# EAGLE board X12 Power Distribuition (EAGLE 9.2.0)
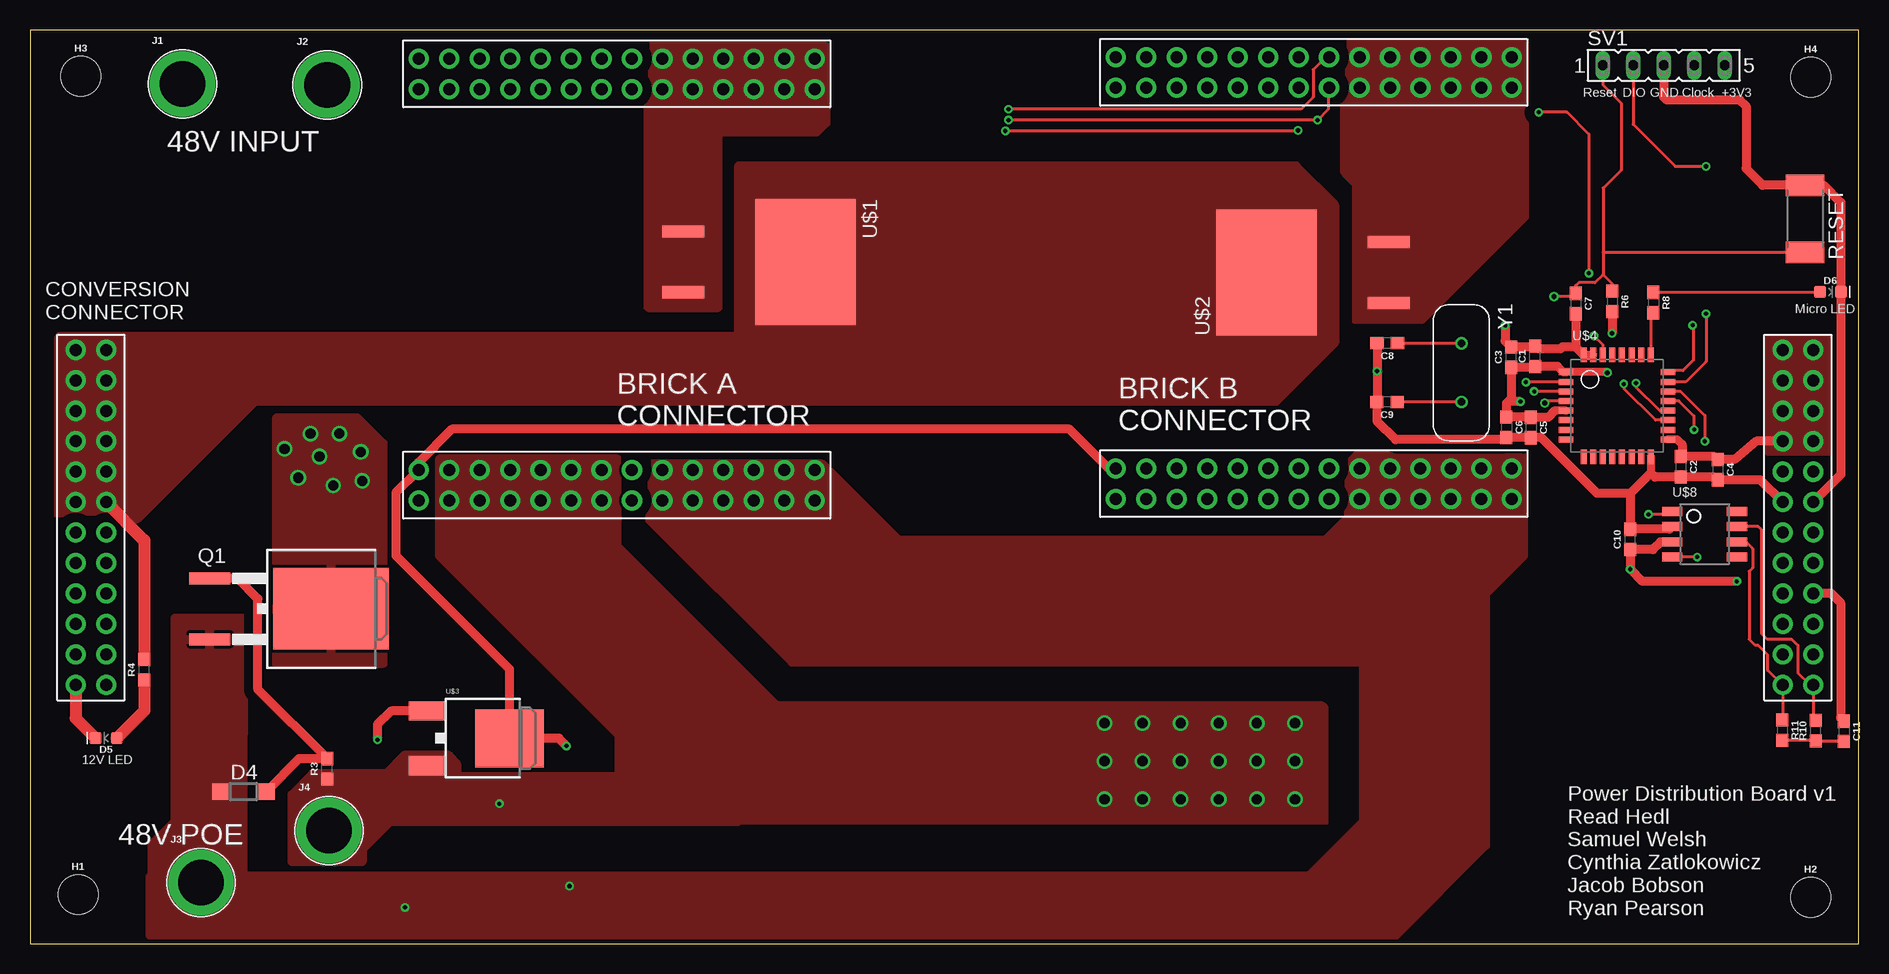
[diagram p0: board, top side]
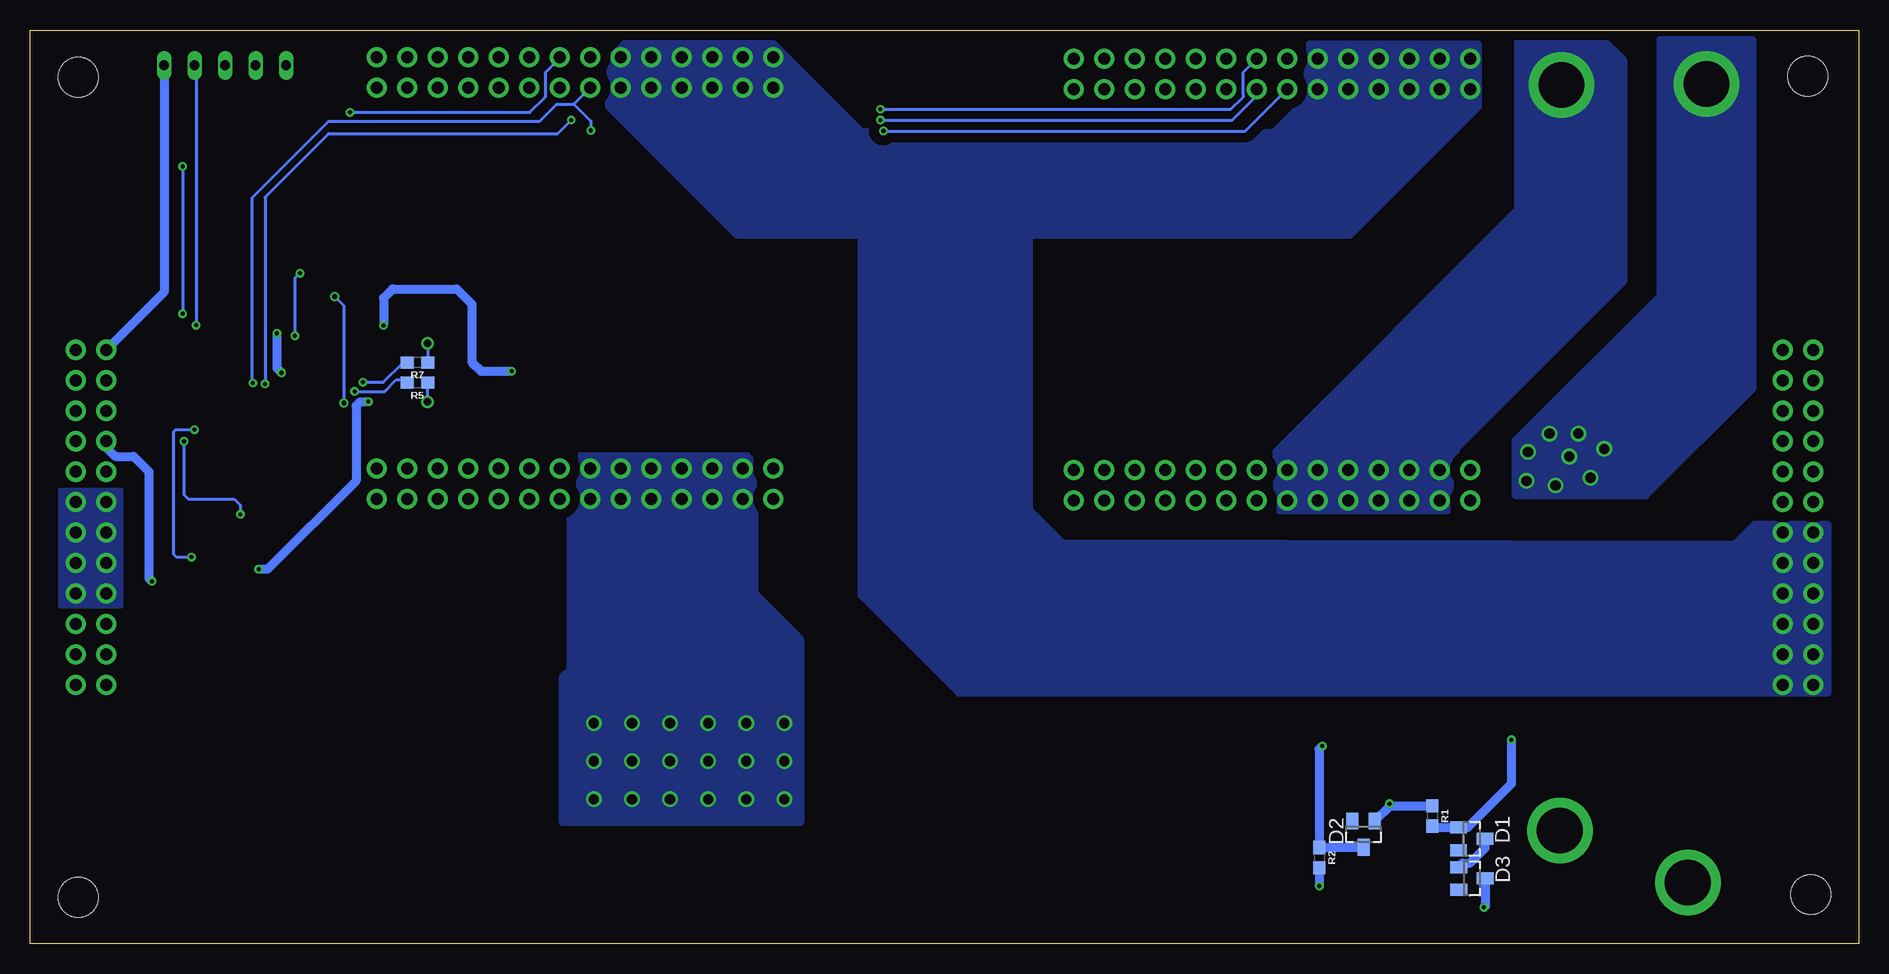
[diagram p1: board, bottom side, seen from below]

Size 152.4 x 76.2 mm. Coordinates in mm from the lower left corner, seen from the top.
Outline: 0,0 152.4,0 152.4,76.2 0,76.2 0,0
Copper layers (1*16): Top 0.0356mm / dielectric 1.5011mm / Bottom 0.0356mm
Design rules "ECE_Senior_Design": minimum track width 8mil, minimum drill 13mil, track to track 8mil, track to pad 8mil, pad to pad 6mil, via to via 8mil, smd to smd 6mil, copper to edge 15mil, drill to drill 8mil, minimum pad ring 7mil, minimum via ring 7mil, stop-mask expansion 3mil, vias tented up to drill 0mil, thermal gap 10mil

## Footprints (pad centres in the part's own frame; a part is rotated, then mirrored left to right if it is on the bottom)
0603 = smd 1.1 x 1: 1 -0.85,0; 2 0.85,0
SOT23 = smd 1 x 1.4: 1 -0.95,-1.1; 2 0.95,-1.1; 3 0,1.1
SOD123 = smd 1.4 x 1.4: A 1.9,0; C -1.9,0
LED-0603 = smd 1 x 1: A -0.877,0; C 0.877,0
STAND-OFF = hole 3.302: 0,0
BANANA_CONN = drill 3.81 pad 5.461: P$1 0,0
TO263 = smd 1 x 3.4: 1 -2.54,-6.6; 2 2.54,-6.6 | smd 6.8 x 9.6: 3 0,3.5
SW_2512 = smd 1.8 x 3.2: 1 -2.8,0; 2 2.8,0
FE05-1 = drill 0.813 long: 1 -5.08,0; 2 -2.54,0; 3 0,0; 4 2.54,0; 5 5.08,0
DIODE = smd 1.016 x 3.504: IN1 2.705,-6.023; IN2 7.785,-6.023 | smd 10.49 x 8.38: OUT 5.245,4.19
DPAK = smd 1.6 x 3: 1 -2.28,-5.31; 3 2.28,-5.31 | smd 4.826 x 5.715: 4 0,1.588
STM32F042K6T6 = smd 1.2 x 0.5: NRST 0,3.2; PA0 0,1.6; PA1 0,0.8; PA2 0,0; PA8 8.5,0.8; PA9 8.5,1.6; PA10 8.5,2.4; PA11 8.5,3.2; PA12 8.5,4; PA13 8.5,4.8; PA14 8.5,5.6; PF0-OSC_IN 0,4.8; PF1-OSC_OUT 0,4; VDD 0,5.6; VDDA 0,2.4; VDDIO2 8.5,0 | smd 0.5 x 1.2: PA3 1.45,-1.45; PA4 2.25,-1.45; PA5 3.05,-1.45; PA6 3.85,-1.45; PA7 4.65,-1.45; PA15 7.05,7.05; PB0 5.45,-1.45; PB1 6.25,-1.45; PB3 6.25,7.05; PB4 5.45,7.05; PB5 4.65,7.05; PB6 3.85,7.05; PB7 3.05,7.05; PB8-BOOT0 2.25,7.05; VSS 7.05,-1.45; VSS1 1.45,7.05
BRICKBOARD_TSW_14X2 = drill 1 pad 1.676: 1 0,2.54; 2 0,0; 3 2.54,2.54; 4 2.54,0; 5 5.08,2.54; 6 5.08,0; 7 7.62,2.54; 8 7.62,0; 9 10.16,2.54; 10 10.16,0; 11 12.7,2.54; 12 12.7,0; 13 15.24,2.54; 14 15.24,0; 15 17.78,2.54; 16 17.78,0; 17 20.32,2.54; 18 20.32,0; 19 22.86,2.54; 20 22.86,0; 21 25.4,2.54; 22 25.4,0; 23 27.94,2.54; 24 27.94,0; 25 30.48,2.54; 26 30.48,0; 27 33.02,2.54; 28 33.02,0; 29 0,36.83; 30 0,34.29; 31 2.54,36.83; 32 2.54,34.29; 33 5.08,36.83; 34 5.08,34.29; 35 7.62,36.83; 36 7.62,34.29; 37 10.16,36.83; 38 10.16,34.29; 39 12.7,36.83; 40 12.7,34.29; 41 15.24,36.83; 42 15.24,34.29; 43 17.78,36.83; 44 17.78,34.29; 45 20.32,36.83; 46 20.32,34.29; 47 22.86,36.83; 48 22.86,34.29; 49 25.4,36.83; 50 25.4,34.29; 51 27.94,36.83; 52 27.94,34.29; 53 30.48,36.83; 54 30.48,34.29; 55 33.02,36.83; 56 33.02,34.29
CONVERSION_TSW_12X2 = drill 1 pad 1.676: 1 0,2.54; 2 0,0; 3 2.54,2.54; 4 2.54,0; 5 5.08,2.54; 6 5.08,0; 7 7.62,2.54; 8 7.62,0; 9 10.16,2.54; 10 10.16,0; 11 12.7,2.54; 12 12.7,0; 13 15.24,2.54; 14 15.24,0; 15 17.78,2.54; 16 17.78,0; 17 20.32,2.54; 18 20.32,0; 19 22.86,2.54; 20 22.86,0; 21 25.4,2.54; 22 25.4,0; 23 27.94,2.54; 24 27.94,0; 25 0,144.78; 26 0,142.24; 27 2.54,144.78; 28 2.54,142.24; 29 5.08,144.78; 30 5.08,142.24; 31 7.62,144.78; 32 7.62,142.24; 33 10.16,144.78; 34 10.16,142.24; 35 12.7,144.78; 36 12.7,142.24; 37 15.24,144.78; 38 15.24,142.24; 39 17.78,144.78; 40 17.78,142.24; 41 20.32,144.78; 42 20.32,142.24; 43 22.86,144.78; 44 22.86,142.24; 45 25.4,144.78; 46 25.4,142.24; 47 27.94,144.78; 48 27.94,142.24
TCAN337D = smd 1.7 x 0.75: CANH 5.4,2.54; CANL 5.4,1.27; FAULT 5.4,0; GND 0,2.54; RXD 0,0; S 5.4,3.81; TXD 0,3.81; VCC 0,1.27
XTAL_ECS-80-S-4X = drill 0.63 pad 1.03: 1 -2.44,0; 2 2.44,0

## Placement (x,y rotation side)
C1  4.7uF  [0603]  125.43,49 90 top
C2  4.7uF  [0603]  137.57,39.78 270 top
C3  4.7uF  [0603]  123.44,48.92 90 top
C4  4.7uF  [0603]  140.64,39.55 270 top
C5  4.7uF  [0603]  125.07,43.05 270 top
C6  4.7uF  [0603]  123.04,43.08 270 top
C7  4.7uF  [0603]  128.8,53.39 270 top
C8  4.7uF  [0603]  113.11,50.09 180 top
C9  4.7uF  [0603]  113.08,45.19 180 top
C10  4.7uF  [0603]  133.35,33.73 90 top
C11  0.1uF  [0603]  151.16,17.73 270 top
D1  22V  [SOT23]  32.26,8.76 270 bottom
D2  5V  [SOT23]  41.27,9.14 180 bottom
D3  22V  [SOT23]  32.23,5.46 270 bottom
D4  15V  [SOD123]  17.78,12.7 0 top
D5  [LED-0603]  6.35,17.14 180 top
D6  [LED-0603]  150.04,54.36 0 top
H1  STAND-OFF  [STAND-OFF]  4.01,4.11 0 top
H2  STAND-OFF  [STAND-OFF]  148.39,3.89 0 top
H3  STAND-OFF  [STAND-OFF]  4.24,72.34 0 top
H4  STAND-OFF  [STAND-OFF]  148.39,72.26 0 top
J1  [BANANA_CONN]  12.7,71.7 0 top
J2  [BANANA_CONN]  24.77,71.63 0 top
J3  [BANANA_CONN]  14.25,5.11 0 top
J4  [BANANA_CONN]  24.92,9.45 0 top
Q1  SPB80P06P  [TO263]  21.59,27.94 270 top
R1  1M  [0603]  35.56,10.67 270 bottom
R2  10K  [0603]  44.98,7.19 270 bottom
R3  1M  [0603]  24.77,14.61 90 top
R4  470  [0603]  9.53,22.86 90 top
R5  1k  [0603]  120.12,46.79 180 bottom
R6  1k  [0603]  131.85,53.57 270 top
R7  1k  [0603]  120.12,48.49 180 bottom
R8  470  [0603]  135.28,53.47 270 top
R10  60  [0603]  148.82,17.78 90 top
R11  60  [0603]  146.02,17.83 270 top
RESET  [SW_2512]  147.93,60.45 270 top
SV1  [FE05-1]  136.14,73.25 0 top
U$1  DIODE  [DIODE]  60.45,62.1 270 top
U$2  DIODE  [DIODE]  107.21,50.72 90 top
U$3  NMOSFET-DPAK  [DPAK]  38.35,17.14 270 top
U$4  STM32F042K6T6  [STM32F042K6T6]  128.02,42.06 0 top
U$5  BRICKBOARD_TSW_14X2  [BRICKBOARD_TSW_14X2]  90.47,37.11 0 top
U$6  CONVERSION_TSW_12X2  [CONVERSION_TSW_12X2]  3.81,49.53 270 top
U$7  BRICKBOARD_TSW_14X2  [BRICKBOARD_TSW_14X2]  32.38,36.98 0 top
U$8  TCAN337D  [TCAN337D]  136.86,32.26 0 top
Y1  ECS-80-S-4X  [XTAL_ECS-80-S-4X]  119.28,47.62 270 top

## Library data of the parts
C1-C10 = SparkFun-Capacitors; PROD_ID: CAP-08280
C11 = SparkFun-Capacitors; PROD_ID: CAP-00810
D1-D4 = diode
D5 D6 = SparkFun-LED
H1-H4 = SparkFun-Hardware
J1-J4 = SparkFun-Connectors
Q1 = transistor-fet
R1-R3 = SparkFun-Resistors; SPICEPREFIX: R
R4 R8 = SparkFun-Resistors
R5-R7 R10 R11 = SparkFun-Resistors; PROD_ID: RES-07856
RESET = DiscreteComponents
SV1 = con-lsta; OC_FARNELL: unknown; OC_NEWARK: unknown
U$1 U$2 = DIODE
U$3 = MotherboardParts; PN-DIGI: 497-4329-1-ND; VDSS: 60V
U$4 U$8 = PI_Shield_Library
U$5 U$7 = Dist_to_Brickboard_Connector
U$6 = Dist_to_Conversion_Connector
Y1 = ECS-80-S-4X; DESCRIPTION: Crystal 8MHz Series 2-Pin HC-49/U; DIGI-KEY_PART_NUMBER: X1057-ND; DIGI-KEY_PURCHASE_URL: https://www.digikey.com/product-detail/en/ecs-inc/ECS-80-S-4X/X1057-ND/827549?utm_source=snapeda&utm_medium=aggregator&utm_campaign=symbol; MF: ECS International; MP: ECS-80-S-4X; PACKAGE: HC-49/US ECS International

## Nets
3V3GND: C1.2 C2.2 C3.2 C4.2 C5.2 C6.2 C7.2 C8.2 C9.2 C10.2 C11.1 D6.C RESET.1 SV1.3 U$4.PB8-BOOT0 U$4.VSS U$4.VSS1 U$6.35 U$6.36 U$6.37 U$6.38 U$6.39 U$6.40 U$6.41 U$6.42 U$8.GND
48V_GND: D2.1 J2.P$1 J4.P$1 R1.1 R3.1 U$3.3 U$5.3 U$5.4 U$5.5 U$5.6 U$5.7 U$5.8 U$5.9 U$5.10 U$5.11 U$5.12 U$5.13 U$5.14 U$7.3 U$7.4 U$7.5 U$7.6 U$7.7 U$7.8 U$7.9 U$7.10 U$7.11 U$7.12 U$7.13 U$7.14
+3V3: C1.1 C2.1 C3.1 C4.1 C5.1 C6.1 C10.1 R6.2 SV1.5 U$4.VDD U$4.VDDA U$4.VDDIO2 U$6.25 U$6.26 U$6.27 U$6.28 U$6.29 U$6.30 U$6.31 U$6.32 U$8.VCC
+12V: R4.2 U$1.OUT U$2.OUT U$6.1 U$6.2 U$6.3 U$6.4 U$6.5 U$6.6 U$6.7 U$6.8 U$6.9 U$6.10 U$6.11 U$6.12
+12V_A: U$1.IN1 U$1.IN2 U$7.45 U$7.46 U$7.47 U$7.48 U$7.49 U$7.50 U$7.51 U$7.52 U$7.53 U$7.54 U$7.55 U$7.56
+12V_B: U$2.IN1 U$2.IN2 U$5.45 U$5.46 U$5.47 U$5.48 U$5.49 U$5.50 U$5.51 U$5.52 U$5.53 U$5.54 U$5.55 U$5.56
+48V: D3.3 D4.C J3.P$1 Q1.2 R2.2 U$5.17 U$5.18 U$5.19 U$5.20 U$5.21 U$5.22 U$5.23 U$5.24 U$5.25 U$5.26 U$5.27 U$5.28 U$7.17 U$7.18 U$7.19 U$7.20 U$7.21 U$7.22 U$7.23 U$7.24 U$7.25 U$7.26 U$7.27 U$7.28
+48V_RAW: J1.P$1 Q1.3
ALERT: U$4.PB7 U$5.43 U$7.43
CAN_H: R10.2 U$6.47 U$8.CANH
CAN_L: R11.1 U$6.48 U$8.CANL
CAN_RX: U$4.PA11 U$8.RXD
CAN_TX: U$4.PA12 U$8.TXD
CLK: U$4.PA9 U$5.44 U$7.44
DATA: U$4.PA10 U$5.42 U$7.42
GND: D5.C U$5.29 U$5.30 U$5.31 U$5.32 U$5.33 U$5.34 U$5.35 U$5.36 U$5.37 U$5.38 U$5.39 U$5.40 U$6.13 U$6.14 U$6.15 U$6.16 U$6.17 U$6.18 U$6.19 U$6.20 U$6.21 U$6.22 U$6.23 U$6.24 U$7.29 U$7.30 U$7.31 U$7.32 U$7.33 U$7.34 U$7.35 U$7.36 U$7.37 U$7.38 U$7.39 U$7.40
LED: R8.2 U$4.PA15
N$1: D1.3 D3.1
N$2: D1.1 R1.2 U$3.1
N$3: D4.A Q1.1 R3.2
N$4: D5.A R4.1
N$5: C11.2 R10.1 R11.2
N$6: C9.1 R5.1 Y1.2
N$7: C8.1 R7.1 Y1.1
N$24: D6.A R8.1
NRST: C7.1 R6.1 RESET.2 SV1.1 U$4.NRST
ON/OFF: D2.3 R2.1 U$3.4 U$5.1 U$7.1
OSC_IN: R7.2 U$4.PF0-OSC_IN
OSC_OUT: R5.2 U$4.PF1-OSC_OUT
SWCLK: SV1.4 U$4.PA14
SWDIO: SV1.2 U$4.PA13

## Tracks (layer width: path | path; a pad name or v marks a point on that pad's centre or on a via)
3V3GND  (via drill 0.35)
  Top 0.686: U$4.PB8-BOOT0 U$4.VSS1 | U$4.VSS 135.07,39.28
  Top 0.762: U$6.36 144.18,38.7 C4.2 140.41,38.93 C2.2 135.42,38.93 135.07,39.28 133.35,37.56 | U$6.35 150.91,39.16 D6.C 150.91,61.81 149.47,63.25 RESET.1 144.39,63.25 143,64.64 143,69.85 142.49,70.36 136.4,70.36 136.14,70.61 SV1.3 | U$4.VSS1 128.8,49.77 | C7.2 128.8,49.77 | 128.8,49.77 127.7,49.77 127.53,49.61 125.72,49.61 125.47,49.85 C1.2 125.35,49.77 C3.2 122.94,50.28 v122.94,51.56 | C11.1 150.88,18.86 150.88,28.45 150.11,29.21 U$6.41 | U$8.GND 136.64,34.58 C10.2 133.35,37.56 | 133.35,37.56 130.58,37.56 125.94,42.2 C5.2 125.04,42.23 C6.2 122.85,42.04 113.79,42.04 112.23,43.6 C9.2 112.26,45.21 v112.26,47.75 C8.2
  Bottom 0.762: v122.94,51.56 122.94,53.85 122.17,54.61 116.84,54.61 115.57,53.34 115.57,48.51 114.81,47.75 v112.26,47.75
  pour Bottom (no thermals): 144.78,37.85 149.86,37.85 149.86,28.19 144.78,28.19
48V_GND  (via drill 0.35, 0.85 pad 1.3)
  Bottom 0.762: 38.95,11.52 R1.1 | v39.12,11.68 38.95,11.52 | D2.1 39.05,11.52 38.95,11.52
  other vias: 89.53,18.41 92.71,18.41 95.89,18.41 99.06,18.41 102.23,18.41 105.41,18.41 105.41,15.24 105.41,12.06 102.23,12.06 102.23,15.24 99.06,15.24 95.89,15.24 92.71,15.24 89.53,15.24 89.53,12.06 92.71,12.06 95.89,12.06 99.06,12.06
  pour Bottom (isolate 0.813, no thermals): 21.34,75.31 19.68,73.66 19.68,55.24 33.66,41.27 33.66,36.83 34.29,36.2 48.26,36.2 48.9,36.83 48.9,40.64 28.32,61.21 28.32,75.31
  pour Bottom (isolate 0.813, no thermals): 92.08,40.01 92.08,29.21 88.27,25.4 88.27,10.16 107.95,10.16 107.95,22.23 107.31,22.86 107.31,40.01 106.68,40.64 92.71,40.64
  pour Top (no thermals): 21.84,6.86 21.84,12.45 23.62,14.22 29.72,14.22 31.24,15.75 34.8,15.75 35.56,14.99 35.56,13.97 57.66,13.97 58.93,12.7 58.93,10.16 29.97,10.16 27.69,7.87 27.69,6.86
  pour Top (no thermals): 34.11,40.41 34.11,32.38 49.05,17.45 49.05,11.43 50.14,10.34 107.67,10.34 107.85,10.16 107.85,19.66 107.77,19.74 107.67,19.84 62.23,19.84 48.95,33.12 48.95,40.41
+3V3  (via drill 0.35, 0.4)
  Top 0.686: 127.3,48.15 127.79,47.66 U$4.VDD 131.41,47.66 | U$4.VDDA 127.06,44.46 | U$4.VDDIO2 137.26,42.06 137.67,41.66
  Top 0.762: U$6.32 143.87,41.91 142.06,40.4 C4.1 140.41,40.63 C2.1 137.67,40.73 137.67,41.66 | R6.2 131.85,50.93 v131.83,50.9 | 127.3,48.15 C1.1 125.35,48.07 C3.1 123.44,45.47 123.19,45.21 | v131.44,47.62 131.41,47.66 | 127.06,44.46 126.51,43.9 C5.1 125.04,43.93 C6.1 123.04,45.06 123.19,45.21 | U$8.VCC 135.89,33.53 135.24,32.88 C10.1 v133.35,31.24 134.37,30.23 v142.24,30.23 | v124.21,45.21 123.19,45.21
  Bottom 0.762: SV1.5 141.22,54.36 U$6.26 | v131.44,47.62 131.83,48.01 v131.83,50.9 | U$6.32 146.05,41.4 145.29,40.64 143.76,40.64 142.49,39.37 142.49,30.48 v142.24,30.23 | v124.21,45.21 124.88,45.21 125.22,44.87 125.22,38.61 132.59,31.24 v133.35,31.24
  pour Top (no thermals): 144.78,50.55 149.86,50.55 149.86,40.89 144.78,40.89
+12V
  Top 1.016: U$6.11 9.53,33.66 R4.2
  pour Top (isolate 0.813, no thermals): 59.18,64.77 105.41,64.77 108.58,61.59 108.58,50.16 103.76,45.34 18.67,45.34 8.89,35.56 2.54,35.56 2.54,50.55 59.18,50.55
+12V_A
  pour Top (isolate 0.813, no thermals): 51.52,74.75 51.52,53.11 57.33,53.11 57.33,67.74 65.56,67.74 66.32,68.5 66.32,74.75
+12V_B
  pour Top (isolate 0.813, no thermals): 109.58,64.39 110.57,63.4 110.57,52.27 110.41,52.12 116,52.12 124.51,60.63 124.51,75.11 109.58,75.11
+48V  (via drill 0.35)
  Bottom 0.762: D3.3 31.12,3.17 v31.24,3.05 | R2.2 44.98,4.85 v44.96,4.83
  pour Top (isolate 0.762, no thermals): 51.44,40.01 51.44,35.56 63.5,23.5 115.57,23.5 124.46,32.38 124.46,40.64 124.33,40.77 110.62,40.77 109.86,40.01 109.86,35.56 107.95,33.66 72.39,33.66 66.04,40.01
  pour Top (no thermals): 12.06,18.92 12.06,10.16 10.16,8.26 10.16,3.17 12.06,1.27 17.14,1.27 17.78,1.91 17.78,18.92
  pour Top: 112.39,32.38 111.12,31.11 120.65,31.11 119.38,32.38
  pour Top: 111.12,32.38 111.12,10.16 106.56,5.59 10.03,5.59 10.03,0.76 113.79,0.76 121.28,8.26 121.28,32.38
  pour Top (isolate 0.762): 12.09,17.53 12.09,27.18 17.78,27.18 17.78,17.53
+48V_RAW  (via drill 0.85, 0.85 pad 1.3)
  other vias: 21.21,41.27 22.35,38.86 24.13,40.64 27.56,41.02 27.69,38.61 23.37,42.55 25.78,42.55 25.27,38.23
  pour Bottom (no thermals): 16.51,75.31 16.51,53.98 28.57,41.91 28.57,37.47 17.78,37.47 8.89,46.35 8.89,75.31
  pour Top: 20.52,23.39 29.44,23.39 29.44,41.68 27.3,43.81 20.52,43.81
ALERT  (via drill 0.35)
  Top 0.254: v130.33,50.7 131.07,49.96 U$4.PB7 | v125.73,69.34 128.09,69.34 129.91,67.53 v129.91,55.92 | U$5.43 107.97,73.94 106.93,72.9 106.93,70.61 105.92,69.6 v81.53,69.6
  Bottom 0.254: v125.73,69.34 110.74,69.34 109.47,70.61 109.47,72.64 108.25,73.86 U$5.43 | U$7.43 51.33,72.64 51.33,70.79 51.31,70.76 51.31,70.61 52.32,69.6 v81.53,69.6 | v129.91,55.92 130.33,55.5 v130.33,50.7
CAN_H
  Top 0.254: R10.2 148.59,18.86 U$6.47 148.34,21.59 147.32,22.61 147.32,24.89 146.81,25.4 144.78,25.4 144.27,25.91 144.27,34.54 144.02,34.8 U$8.CANH
CAN_L
  Top 0.254: R11.1 146.16,18.82 146.05,18.92 U$6.48 144.78,22.86 144.78,24.13 144.02,24.89 143.76,24.89 143.26,25.4 143.26,31.06 143.56,31.36 143.56,32.97 143,33.53 U$8.CANL
CAN_RX  (via drill 0.35)
  Top 0.254: U$4.PA11 137.41,45.26 138.66,44.02 138.66,42.85 v138.68,42.88 | v138.94,32.26 U$8.RXD
  Bottom 0.254: v138.68,42.88 140.26,42.88 140.46,42.67 140.46,32.51 140.21,32.26 v138.94,32.26
CAN_TX  (via drill 0.35)
  Top 0.254: U$4.PA12 137.55,46.06 139.55,44.07 139.57,44.07 v139.57,41.91 | U$8.TXD 136.6,35.81 v134.87,35.81
  Bottom 0.254: v139.57,41.91 139.57,37.47 139.19,37.08 135.38,37.08 134.87,36.58 v134.87,35.81
CLK  (via drill 0.35)
  Top 0.254: U$4.PA9 135.46,43.66 132.81,46.31 v132.81,46.69 | U$5.44 108.2,71.35 108.2,69.6 v107.3,68.69 v81.53,68.69
  Bottom 0.254: v132.81,46.69 132.81,62.26 127.51,67.56 108.42,67.56 v107.3,68.69 | U$7.44 50.16,70.74 52.22,68.69 v81.53,68.69
DATA  (via drill 0.35)
  Top 0.254: U$4.PA10 135.82,44.46 133.83,46.45 v133.83,46.76 | v81.28,67.78 105.62,67.78 v105.66,67.82
  Bottom 0.254: v133.83,46.76 133.91,46.76 133.91,62.18 127.51,68.58 109.93,68.58 108.49,70.03 107.09,70.03 | 107.09,70.03 U$5.42 | U$7.42 51.12,67.78 v81.28,67.78 | v105.66,67.82 105.66,68.6 107.09,70.03
GND
  Top 1.016: D5.C 3.81,18.81 U$6.24
  pour Bottom (isolate 0.813, no thermals): 102.74,75.06 104.14,73.66 104.14,69.85 93.47,59.18 42.42,59.18 31.75,69.85 31.75,74.93 45.72,74.93 46.35,74.3 46.35,69.98 48.77,67.56 83.06,67.56 90.55,75.06
  pour Bottom (isolate 0.813, no thermals): 69.22,67.69 69.22,36.2 66.42,33.4 10.29,33.27 8.64,34.92 2.67,34.92 2.67,20.95 74.93,20.95 83.06,29.08 83.06,67.69
LED
  Top 0.254: R8.2 135.07,52.4 U$4.PA15
N$1
  Bottom 0.762: D3.1 33.01,6.73 32.42,6.73 31.16,7.99 D1.3
N$2  (via drill 0.35)
  Top 0.762: U$3.1 30.09,19.43 28.96,18.29 v28.96,17.02
  Bottom 0.762: R1.2 35.45,9.71 D1.1 32.6,9.71 28.96,13.35 v28.96,17.02
N$3
  Top 0.762: D4.A 22.43,15.46 R3.2 19,21.22 19,28.78 17.3,30.48 Q1.1
N$4
  Top 1.016: R4.1 9.53,19.44 D5.A
N$5
  Top 0.254: R11.2 148.77,16.98 R10.1 148.87,16.88 C11.2
N$6
  Top 0.254: Y1.2 C9.1
  Bottom 0.254: R5.1 119.28,46.77 Y1.2
N$7
  Top 0.254: Y1.1 113.98,50.06 C8.1
  Bottom 0.254: Y1.1 119.27,50.05 R7.1
N$24
  Top 0.254: R8.1 149.12,54.32 D6.A
NRST  (via drill 0.4)
  Top 0.254: SV1.1 131.09,73.23 131.06,73.2 131.06,71.63 132.59,70.1 132.59,64.52 131.09,63.02 131.09,57.66 | R6.1 131.85,55.05 131.09,55.82 | U$4.NRST 126.42,45.26 v126.24,45.09 | 131.09,55.82 130.4,55.13 129.04,55.13 128.8,54.89 C7.1 128.54,53.98 v127,53.98 | 131.09,57.66 131.09,55.82 | 131.09,57.66 131.09,57.65 RESET.2
  Bottom 0.254: v126.24,45.09 126.24,53.21 v127,53.98
ON/OFF  (via drill 0.35)
  Top 0.762: U$5.1 89.89,39.65 86.61,42.93 35.15,42.93 32.38,40.16 U$7.1 30.48,37.62 30.48,32.38 39.94,22.92 U$3.4 44.07,17.14 v44.7,16.51
  Bottom 0.762: D2.3 R2.1 44.98,16.24 v44.7,16.51
OSC_IN  (via drill 0.35)
  Top 0.254: U$4.PF0-OSC_IN 127.99,46.84 v124.65,46.84
  Bottom 0.254: v124.65,46.84 122.96,46.84 121.31,48.49 R7.2
OSC_OUT  (via drill 0.35)
  Top 0.254: U$4.PF1-OSC_OUT v125.35,46.06
  Bottom 0.254: v125.35,46.06 122.85,46.06 121.87,47.04 121.22,47.04 R5.2
SWCLK  (via drill 0.35)
  Top 0.254: v138.56,51.59 138.61,51.54 138.61,48.67 137.74,47.8 136.66,47.8 U$4.PA14
  Bottom 0.254: SV1.4 138.54,73.11 138.54,51.6 v138.56,51.59
SWDIO  (via drill 0.35)
  Top 0.254: v139.68,52.55 139.68,48.56 137.97,46.86 U$4.PA13 | v139.68,64.82 137.09,64.82 137.1,64.83 133.6,68.33 SV1.2
  Bottom 0.254: v139.68,52.55 139.62,52.5 139.6,52.5 139.68,52.58 v139.68,64.82

## Text on the board
tNames: Reset | DIO | GND | Clock | +3V3 | 48V INPUT | Micro LED | CONVERSION / CONNECTOR | BRICK A / CONNECTOR | BRICK B / CONNECTOR | 12V LED | 48V POE | Power Distribution Board v1 / Read Hedl / Samuel Welsh / Cynthia Zatlokowicz / Jacob Bobson / Ryan Pearson